# Altium PCB Board_Scale.PcbDoc
Units mm, origin at the board's own origin, x right, y up, seen from the top; angles counter-clockwise.
Board outline 26.42 x 34.42 mm, 2 copper layers (Top Layer, Bottom Layer); 25 components, 23 nets, 116 pads, 34 vias.
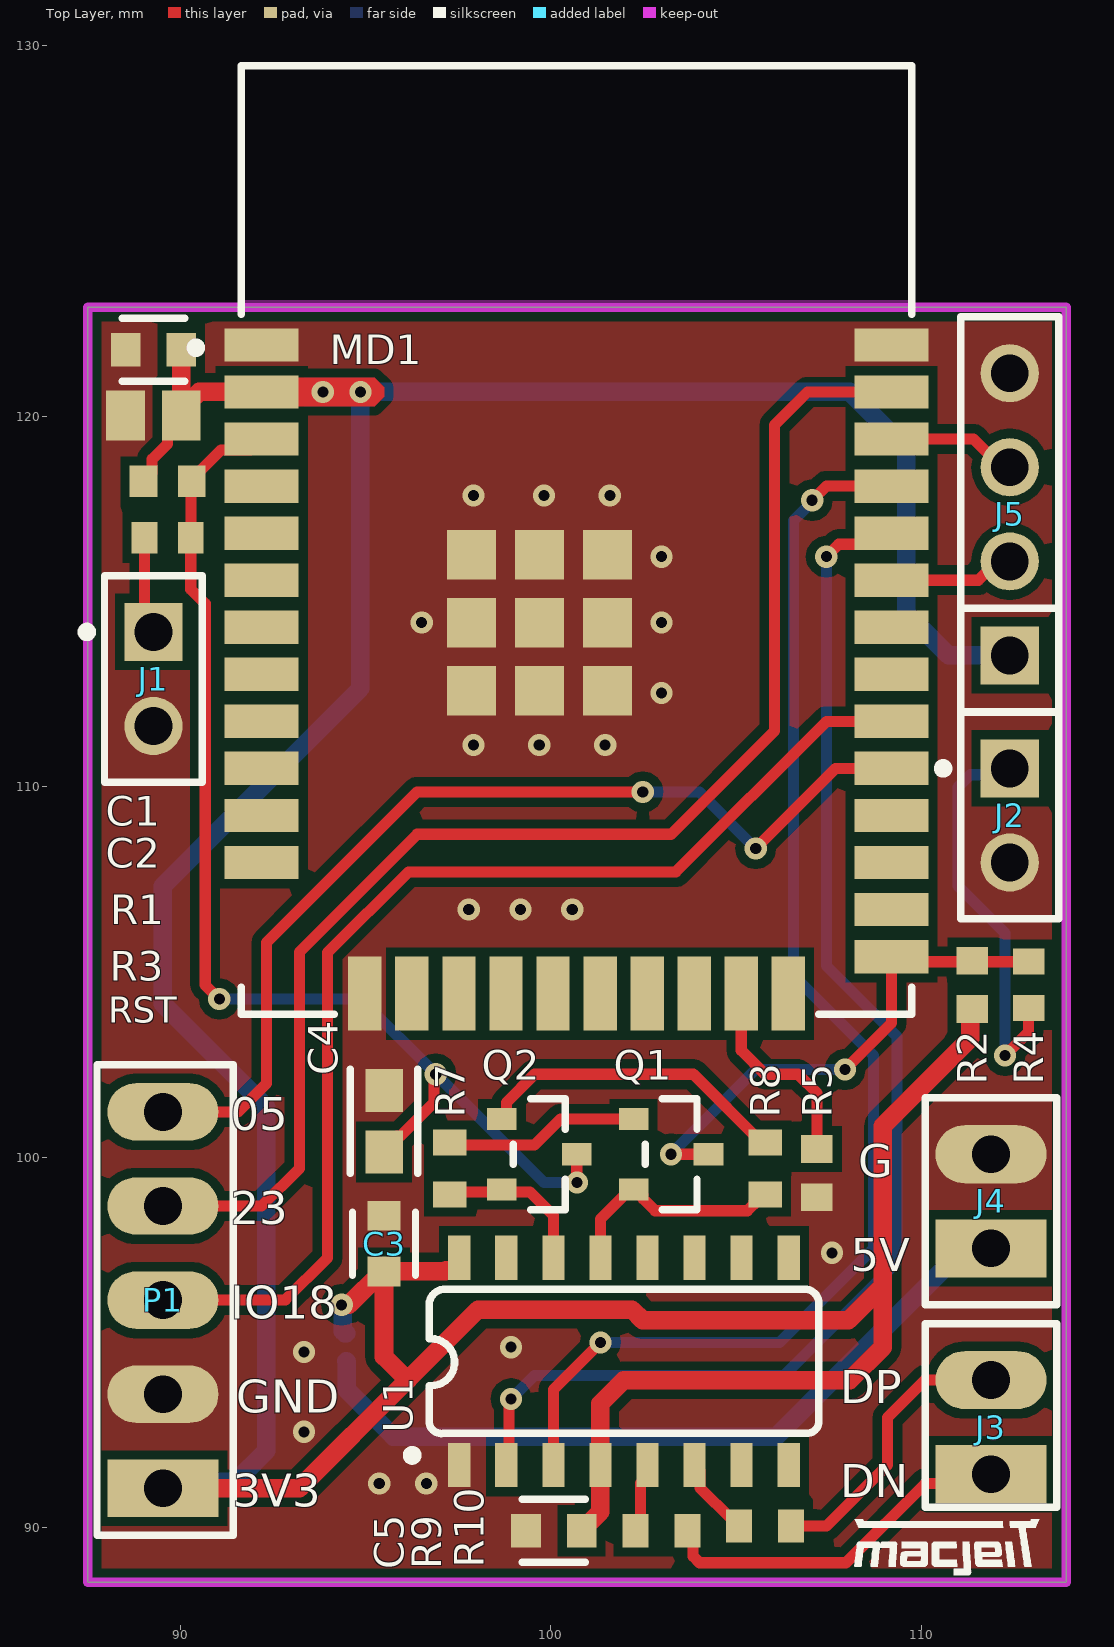
[diagram p0: Top Layer view]
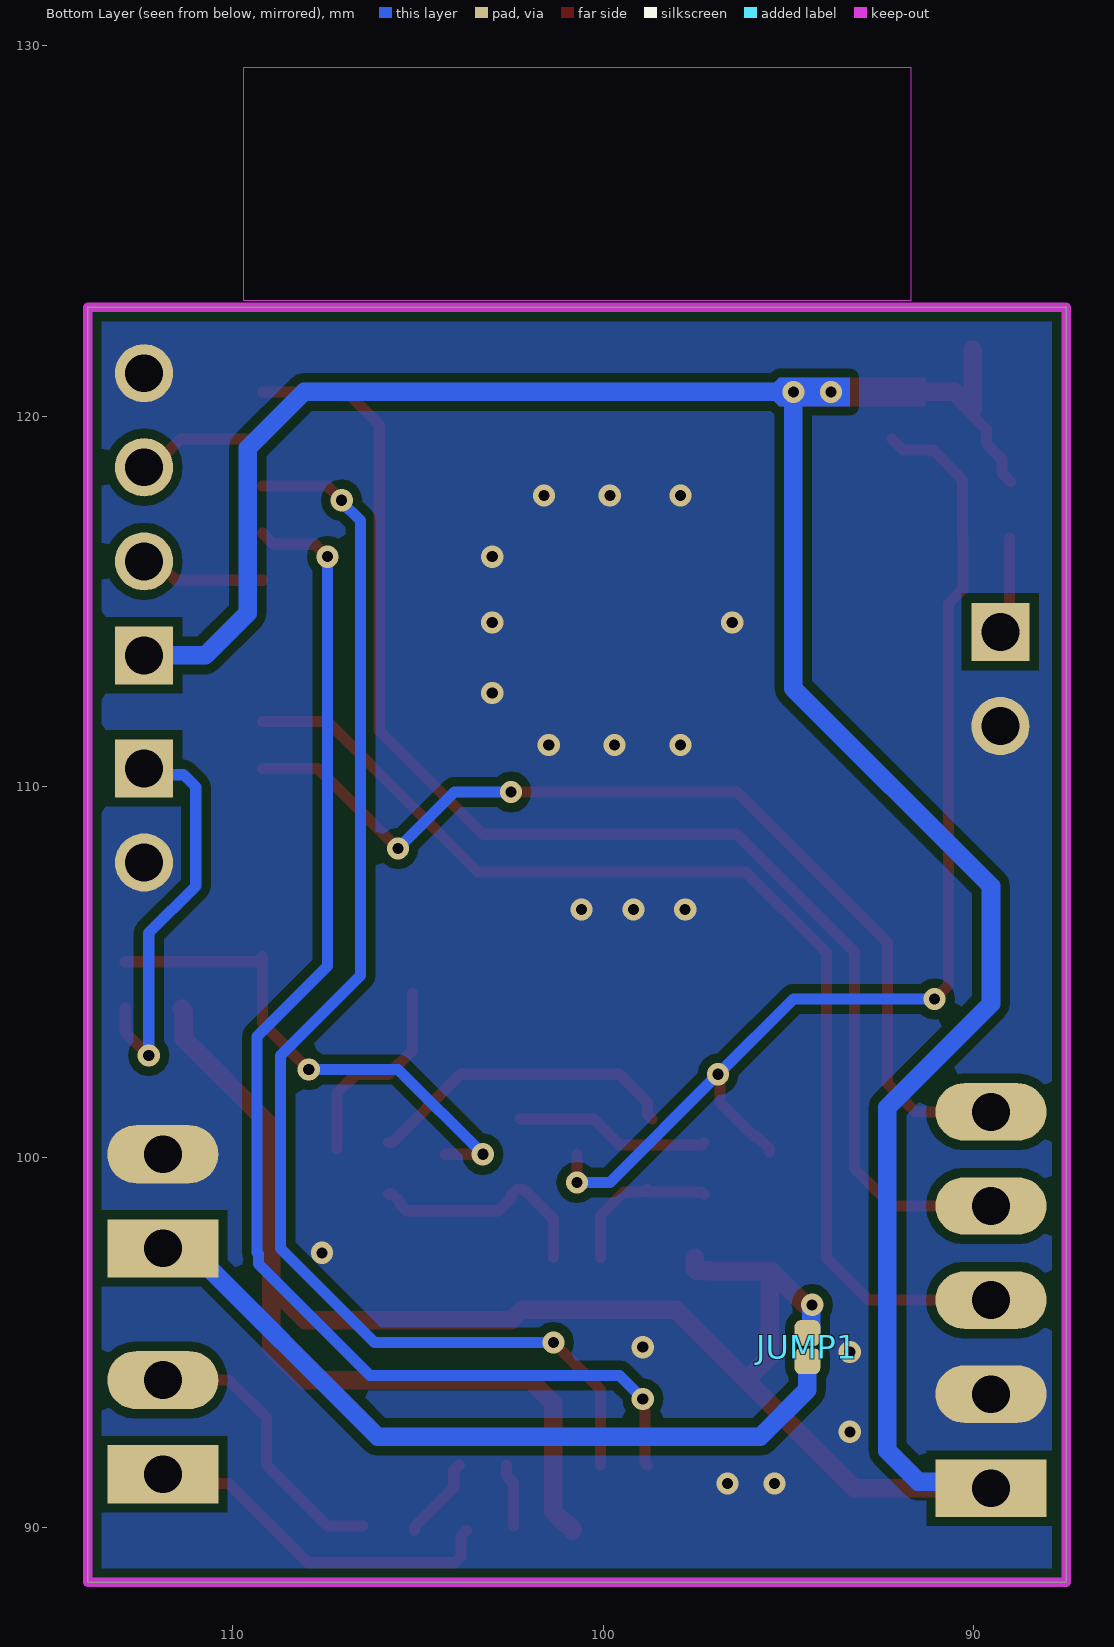
[diagram p1: Bottom Layer view, seen from below]

## Layer stack, top to bottom
Top Solder: solder mask 0.0102, Solder Resist, Dk 3.5
Top Layer: signal copper 0.0356
Dielectric 1: dielectric 0.32, FR-4, Dk 4.8
Bottom Layer: signal copper 0.0356
Bottom Solder: solder mask 0.0102, Solder Resist, Dk 3.5

## Board outline
87.503,88.519 87.503,122.936 113.919,122.936 113.919,88.519

## Design rules (kind name [scope] priority, off if disabled: settings)
Clearance [All] p1: gap=0.254 ignorepadtopadclearanceinfootprint=FALSE
PlaneConnect [All] p1: planeconnectstyle=Direct reliefexpansion=0.508 reliefentries=4 reliefconductorwidth=0.254 reliefairgap=0.254
PolygonConnect [All] p1: connectstyle=Direct reliefconductorwidth=0.254 reliefentries=4 polygonreliefangle="90 Angle" airgapwidth=0.254
RoutingVias [All] p1: holewidth=0.711 width=1.27 viastyle="Through Hole" minholewidth=0.711 minwidth=1.27 maxholewidth=0.711 maxwidth=1.27
SolderMaskExpansion [All] p1: expansion=0.102 istentingtop=FALSE
SupplyNets "Schematic Supply Nets_2" [InNet('VCC')] p1: voltage=0.000
SupplyNets "Schematic Supply Nets_1" [InNet('GND')] p2: voltage=0.000
SupplyNets "Schematic Supply Nets" [InNet('3V3')] p3: voltage=0.000
Width [All] p1: maxlimit=1 minlimit=0.2 preferedwidth=0.3
29 further rules are at their usual default settings.

## Components (designator, comment, footprint, x,y, rotation, side; value= is the part's Value field where it differs from the comment)
C1 "100nF/50V" FP-CC0603-DA-MFG 89.281,121.793 r180 top value="100 nF"
C2 "CL21A226MAQNNNE" CAPC2013X140X45LL15T25 89.281,120.015 r0 top
C3 "100nF/50V" FP-CC0603-DA-MFG 95.504,97.663 r90 top value="100 nF"
C4 "1uF" FP-CL10-IPC_A 95.504,100.965 r90 top
C5 "100nF/50V" FP-CC0603-DA-MFG 100.088,89.916 r180 top value="100 nF"
J1 "M20-9990245" FP-M20-9990245-MFG#1 89.281,112.903 r270 top
J2 "M20-9990245" FP-M20-9990245-MFG#1 112.395,109.22 r270 top
J3 "M20-9990245" FP-M20-9990245-MFG#2 111.887,92.71 r90 top
J4 "M20-9990245" FP-M20-9990245-MFG#2 111.887,98.806 r90 top
J5 "M20-9990445" FP-M20-9990445-MFG 112.395,117.348 r90 top
JUMP1 "JUMPER_2P" JUMPER_2P 94.488,94.869 r0 bottom
MD1 "ESP32-WROOM-32D" FP-ESP32-WROOM-32D-MFG 100.702,116.66 r0 top
P1 "77311-462K05LF" FCI-77311-5_V 89.535,96.139 r90 top
Q1 "SS8050" FP-SS8050-G-MFG 103.251,100.076 r0 top
Q2 "SS8050" FP-SS8050-G-MFG 99.695,100.076 r0 top
R1 "10KR" RESC1609X55X30LL15T15 89.662,118.237 r0 top
R2 "10KR" RESC1609X55X30LL15T15 111.379,104.648 r90 top
R3 "100R" RESC1608X55X30LL15T15 89.662,116.713 r0 top
R4 "100R" RESC1608X55X30LL15T15 112.903,104.648 r90 top
R5 "10KR" RESC1609X55X30LL15T15 107.188,99.568 r270 top
R7 "12KR" RESC1608X55X25NL10T15 97.282,99.695 r90 top
R8 "12KR" RESC1608X55X25NL10T15 105.791,99.695 r90 top
R9 "10R" RESC1608X55X25NL10T15 102.997,89.916 r0 top
R10 "10R" RESC1608X55X25NL10T15 105.791,90.043 r0 top
U1 "CH340C" SO016 101.981,94.488 r0 top

## Footprints (in the part's own frame and the unit in brackets; to place one, negate y for a bottom-side part, rotate by r counter-clockwise, add the part's x,y. Pads: shape width x height; smd on the part's side, far side on the other; paste and mask are expansions set on the pad)
CAPC2013X140X45LL15T25 [mm] "Chip Capacitor, 2-Leads, Body 2.00x1.25mm, IPC High Density"
  rect 1.05x1.35 smd: 1(-0.75,0) 2(0.75,0)
  body extent -1.08,-0.7 1.07,0.7, height 1.4
FCI-77311-5_V [mm] "THD, 5-Leads, Body 12.7x2.4mm, Pitch 2.54mm"
  rect 1.55x3 hole 1.02: 1(-5.08,0)
  oval 1.55x3 hole 1.02: 2(-2.54,0) 3(0,0) 4(2.54,0) 5(5.08,0)
  silkscreen extent -6.35,-1.91 6.35,1.78
FP-CC0603-DA-MFG [mm]
  rect 0.8x0.9 smd paste+0 mask+0: 1(-0.75,0) 2(0.75,0)
  silkscreen extent -0.85,-0.85 0.85,0.85, body extent -1.35,-0.75 1.35,0.75, height 0.25
FP-CL10-IPC_A [mm]
  rect 1.158x1.012 smd paste+0 mask+0: 1(-0.827,0) 2(0.827,0)
  silkscreen extent -1.41,-0.91 1.41,0.91, body extent -1.91,-1.01 1.91,1.01, height 0.25
FP-ESP32-WROOM-32D-MFG [mm]
  rect 2x0.9 smd paste+0 mask+0: 1(-8.5,5.26) 2(-8.5,3.99) 3(-8.5,2.72) 4(-8.5,1.45) 5(-8.5,0.18) 6(-8.5,-1.09) 7(-8.5,-2.36) 8(-8.5,-3.63) 9(-8.5,-4.9) 10(-8.5,-6.17) 11(-8.5,-7.44) 12(-8.5,-8.71) 25(8.5,-11.25) 26(8.5,-9.98) 27(8.5,-8.71) 28(8.5,-7.44) 29(8.5,-6.17) 30(8.5,-4.9) 31(8.5,-3.63) 32(8.5,-2.36) 33(8.5,-1.09) 34(8.5,0.18) 35(8.5,1.45) 36(8.5,2.72) 37(8.5,3.99) 38(8.5,5.26)
  rect 2x0.9 on Top Overlay paste+0 mask+0: 13(-8.5,-9.98) 14(-8.5,-11.25)
  rect 0.9x2 smd paste+0 mask+0: 15(-5.715,-12.25) 16(-4.445,-12.25) 17(-3.175,-12.25) 18(-1.905,-12.25) 19(-0.635,-12.25) 20(0.635,-12.25) 21(1.905,-12.25) 22(3.175,-12.25) 23(4.445,-12.25) 24(5.715,-12.25)
  rect 1.33x1.33 smd paste+0 mask+0: 39(-2.835,-4.075) 39(-2.835,-2.24) 39(-2.835,-0.405) 39(-1,-4.075) 39(-1,-2.24) 39(-1,-0.405) 39(0.835,-4.075) 39(0.835,-2.24) 39(0.835,-0.405)
  Keep-Out Layer region: -9,6.45 9,6.45 9,12.75 -9,12.75
  Keep-Out Layer region: -9,6.45 9,6.45 9,12.75 -9,12.75
  silkscreen extent -10.4,-12.8 9.05,12.8, body extent -9.6,-13.35 9.6,12.9, height 0.25
FP-M20-9990245-MFG#1 [mm]
  rect 1.57x1.57 hole 1.02 paste-2539.97 mask+0: 1(-1.27,0)
  round 1.57 hole 1.02 paste-2539.97 mask+0: 2(1.27,0)
  silkscreen extent -2.79,-1.92 2.79,1.32
FP-M20-9990245-MFG#2 [mm]
  rect 1.57x3 hole 1.02 paste-2539.97 mask+0: 1(-1.27,0)
  oval 1.57x3 hole 1.02 paste-2539.97 mask+0: 2(1.27,0)
  silkscreen extent -2.16,-1.78 2.79,1.78
FP-M20-9990445-MFG [mm]
  rect 1.57x1.57 hole 1.02 paste-2539.97 mask+0: 1(-3.81,0)
  round 1.57 hole 1.02 paste-2539.97 mask+0: 2(-1.27,0) 3(1.27,0) 4(3.81,0)
  silkscreen extent -5.33,-1.32 5.33,1.32
FP-SS8050-G-MFG [mm]
  rect 0.8x0.6 smd paste+0 mask+0: 1(-1.01,0.95) 2(-1.01,-0.95) 3(1.01,0)
  silkscreen extent -0.7,-1.5 0.7,1.5, body extent -1.51,-1.6 1.51,1.6, height 0.25
JUMPER_2P [mm]
  rrect50% 0.7x0.7 smd paste-2539.97: 1(0,0.381) 2(0,-0.381)
RESC1608X55X25NL10T15 [mm] "Chip Resistor, 2-Leads, Body 1.70x0.90mm, IPC Medium Density"
  rect 0.7x0.9 smd: 1(-0.7,0) 2(0.7,0)
  body extent -0.85,-0.45 0.85,0.45, height 0.55
RESC1608X55X30LL15T15 [mm] "Chip Resistor, 2-Leads, Body 1.60x0.80mm, IPC High Density"
  rect 0.7x0.85 smd: 1(-0.625,0) 2(0.625,0)
  body extent -0.87,-0.48 0.87,0.48, height 0.55
RESC1609X55X30LL15T15 [mm] "Chip Resistor, 2-Leads, Body 1.75x0.95mm, IPC High Density"
  rect 0.75x0.85 smd: 1(-0.65,0) 2(0.65,0)
  body extent -0.87,-0.48 0.87,0.48, height 0.55
SO016 [mm]
  rect 0.6x1.2 smd: 1(-4.445,-2.8) 2(-3.175,-2.8) 3(-1.905,-2.8) 4(-0.635,-2.8) 5(0.635,-2.8) 6(1.905,-2.8) 7(3.175,-2.8) 8(4.445,-2.8) 9(4.445,2.8) 10(3.175,2.8) 11(1.905,2.8) 12(0.635,2.8) 13(-0.635,2.8) 14(-1.905,2.8) 15(-3.175,2.8) 16(-4.445,2.8)
  silkscreen extent -5.84,-2.67 5.26,1.95, body extent -5,-2.87 5,3.13, height 1.8

## Part data
C1 C3 C5: library part CMP-2100-03601-2, "CAP CER 0.1UF 50V X7R 0603", Capacitance="100 nF", LCSC=C14663, Manufacturer=YAGEO, Manufacturer Part Number=CC0603KRX7R9BB104, Package=CC0603-DA, Temperature="-55°C to +125°C", Temperature Characteristic=X7R, Temperature Coefficient=15%, Temperature Range High=+125°C, Temperature Range Low=-55°C, Tolerance=0.1, Voltage="50 V", Automotive=No, Category=Cap, ComponentLink2Description=Datasheet, ComponentLink2URL=http://www.yageo.com/documents/recent/UPY-GPHC_X7R_6.3V-to-50V_18.pdf, Device Class L1="Passive Components", Device Class L2=Capacitors, Device Class L3="Ceramic Capacitors", Digikey Description="CAP CER 0.1UF 50V X7R 0603", Footprint Url=http://www.yageo.com/exep/pages/download/literatures/UPY-C_GEN_24.pdf, Height=0.9mm, Lead Free=Yes, Material=Ceramic, Mouser Description="Multilayer Ceramic Capacitor, CC Series, 0.1 - F, - 10%, X7R, 50 V, 0603 [1608 Metric]", Octopart=https://octopart.com/cc0603krx7r9bb104-yageo-42244635, RoHS=TRUE, Voltage Rating="50 V"
C2: library part CMP-2000-06104-1, "Multi-layer Ceramic Capacitor, 22 uF, -55 to 85 degC, 2-Pin SMD (0805), RoHS, Tape and Reel", Capacitance=22µF, LCSC=C45783, Manufacturer="Samsung Electro-Mechanics", Operating Temperature=-55°C~85°C, Package / Case=0805(2012Metric), Package Description="2-Pin Surface Mount Device, Body 2.0 x 1.25 mm", Package Reference=0805, Ratings=-, Standard Package=2,000, Temperature Coefficient=X5R, Tolerance=±20%, Voltage - Rated=25V, Applications=GeneralPurpose, Category=Capacitors, Datasheet URL=http://datasheet.octopart.com/CL21A226MAQNNNE-Samsung-datasheet-48647558.pdf, Datasheet Version=07/2015, Family=CeramicCapacitors, Featured Product=Multi-LayerCeramicCapacitors, Features=-, Height - Seated (Max)=-, Lead Spacing=-, Lead Style=-, Manufacturer URL=http://www.samsungsem.com/global/index.jsp, Mounting Technology=SurfaceMount, Mounting Type=SurfaceMount,MLCC, Online Catalog=CLSeries,HighCapacitance, Other Names=1276-2908-2, Packaging=Tape&Reel(TR), Product Training Modules=HighCapMLCCFamily, RoHS Information=MLCCRoHS2Compliance, Series=CL, Size / Dimension="0.079\"Lx0.049\"W(2.00mmx1.25mm)", Thickness (Max)="0.055\"(1.40mm)"
C4: library part CMP-13271-001457-1, "Cap Ceramic 1uF 16V X5R ±10% Pad SMD 0603 +85°C T/R", Case Code (Imperial)=0603, Case Code (Metric)=1608, Dielectric=X5R, LCSC=C1592, Max Operating Temperature=85°C, Min Operating Temperature=-55°C, Package Quantity=1, Tolerance=10%, Voltage=16V, Capacitance=1uF, Case/Package=0603, Contact Plating=Tin, Depth=0.8mm, Height=0.8mm, Lead Free="Lead Free", Length=1.6mm, Material=Ceramic, Mount="Surface Mount", Packaging="Tape and Reel", Radiation Hardening=No, Thickness=0.035inch, Voltage Rating=16V, Voltage Rating (DC)=16V, Width=0.031inch
J1 J2 J3 J4: library part CMP-15831-000105-1, "CONN HEADER VERT 2POS 2.54MM", Case/Package=SIL, Color=Black, Contact Resistance=25mR, Current=3A, Flammability Rating="UL94 V-0", Insulation Resistance=10GR, Max Operating Temperature=105°C, Min Operating Temperature=-40°C, Package Quantity=1000, Voltage=50V, Voltage Rating (AC)=750V, Connector Type="Male Pin", Contact Finish - Mating=GOLD, Contact Material=Brass, Contact Mating Length=0.24inch, Contact Plating=Gold, Contact Shape=Square, Contact Type="Male Pin", Current Rating=3A, Depth=2.54mm, Fastening Type=Pull, Gender=Male, Height=0.12inch, Housing Color=Black, Housing Material=Nylon, Insulation Color=Black, Insulation Material=Nylon, Lead Pitch=2.54mm, Length=5.08mm, Mated Stacking Heights=16.54mm, Mating Cycles=300, Max Current Rating=3A, Mount="Through Hole", Number Of Contacts=2, Number of Poles=2, Number of Positions=2, Number Of Rows=1, Orientation=Straight, Packaging=Bulk, Pitch=2.54mm, Radiation Hardening=No, Reach SVHC Compliant=Yes, Series=M20, Termination=Solder, Weight=0.25lb, Width=0.25inch, Working Voltage=750V
J5: library part CMP-00671-05399696-1, "M20-9990445 Conn Unshrouded Header HDR 4 POS 2.54mm Solder ST Thru-Hole Bulk/Loose", Case/Package=SIL, Color=Black, Contact Resistance=25mΩ, Current Rating=3A, Insulation Resistance=10GΩ, Max Operating Temperature=105°C, Min Operating Temperature=-40°C, Voltage Rating (AC)=750V, Connector Type="Male Pin", Contact Material="Brass, Bronze, Gold, Nickel", Contact Mating Length=6.096mm, Contact Plating=Gold, Depth=2.54mm, Gender=Male, Height=2.54mm, Housing Color=Black, Housing Material=Nylon, Lead Pitch=2.54mm, Length=10.16mm, Max Current Rating=3A, Mount="Through Hole", NexarPartId=5399696, Number Of Contacts=4, Number of Pins=4, Number of Positions=4, Number Of Rows=1, Orientation=Straight, Pitch=2.54mm, Radiation Hardening=No, REACH SVHC="No SVHC", RoHS=Compliant, Termination=Solder, Voltage Rating (DC)=750V, Weight=45.359237g, Width=12.7mm
MD1: library part CMP-194065-000003-1, "WIFI MODULE 32MBITS SPI FLASH", LCSC=C473012, Manufacturer="Espressif Systems", Max Frequency=2484MHz, Max Supply Voltage=3.6V, Min Supply Voltage=3V, Nominal Supply Current=500mA, Temperature="-40°C to +85°C", Temperature Range High=+85°C, Temperature Range Low=-40°C, Automotive=No, Bandwidth=72MHz, Category=UNK, ComponentLink2Description=Datasheet, ComponentLink2URL=https://www.espressif.com/sites/default/files/documentation/esp32-wroom-32d_esp32-wroom-32u_datasheet_en.pdf, Data Rate=150Mbits/s, Device Class L1="Integrated Circuits (ICs)", Device Class L2="RF Semiconductors and Devices", Device Class L3=Transceivers, Digikey Description="WIFI MODULE 32MBITS SPI FLASH", Height=3.2mm, Interface=I2C,SPI,UART,Ethernet,I2S,Other, Lead Free=Yes, Manufacturer Part Number=ESP32-WROOM-32D, Mouser Description="Wi-Fi/BT BLE Module ESP32-D0WD, SPI Flash, UART, P", Number Of Adc Channels=16, Number Of Gpio=32, Octopart=https://octopart.com/esp32-wroom-32d-espressif+systems-91040050, Package=ESP32-WROOM-32D, RoHS=TRUE, Sensitivity=-98dBm
P1: library part CMP-1698-00006-1, "Male Header, Pitch 2.54 mm, 1 x 5 Position, Height 16.24 mm, Tail Length 3.05 mm,  / -65 to 125 degC, RoHS, Tape and Reel", Current Rating="1 A", Max Operating Temperature=85degC, Min Operating Temperature=-25degC, Package Quantity=500, ComponentLink1Description="Manufacturer URL", ComponentLink1URL=http://portal.fciconnect.com/, ComponentLink2Description=Datasheet, ComponentLink2URL=http://portal.fciconnect.com/Comergent//fci/drawing/77311.pdf, Contact Material=Brass, DatasheetVersion="Rev. CK, 07/2016", Gender=Female, PackageDescription="Male Header, Pitch 2.54 mm, 1 x 5 Position, Height 16.24 mm, Tail Length 3.05 mm", PackageReference=77311-5, Packaging="Tape and Reel", RoHSCompliant=True, Shielding=Shielded
Q1 Q2: library part CMP-20235-000001-1, "NPN TRANSISTOR 1.5A 40V SOT-23 R", Case/Package=TO-236-3, Collector Emitter Breakdown Voltage=25V, Collector Emitter Voltage (VCEO)=400mV, LCSC=C181160, Max Collector Current=1.5A, Max Power Dissipation=300mW, Transition Frequency=100MHz, Max Breakdown Voltage=25V, Mount="Surface Mount", Packaging="Tape and Reel", RoHS Compliant=Yes
R1 R2 R5: library part CMP-1012-00623-3, "Chip Resistor, 10 KOhm, +/- 1%, 0.1 W, -55 to 155 degC, 0603 (1608 Metric), RoHS, Tape and Reel", Case Code (Imperial)=0603, Case Code (Metric)=1608, LCSC=C25804, Manufacturer=Panasonic, Max Operating Temperature=155degC, Max Power Dissipation=100mW, Min Operating Temperature=-55degC, Package Description="2-Pin Surface Mount Device, Body 1.6 x 0.85 mm", Package Quantity=1, Package Reference=603, Resistance=10KOhm, Temperature Coefficient=100ppm\/degreesC, Tolerance=1%, Voltage Rating=75V, Case\/Package=0603, Composition=ThickFilm, Contact Plating=Tin, Datasheet URL=https://industrial.panasonic.com/cdbs/www-data/pdf/RDA0000/AOA0000C304.pdf, Datasheet Version=02/2017, Depth=0.8mm, Height=0.45mm, Lead Free=LeadFree, Length=1.6mm, Manufacturer URL=http://www.panasonic.com/, Military Standard=Not, Mount=SurfaceMount, Mounting Technology=SurfaceMount, Number of Pins=2, Number of Terminations=2, Packaging=TapeandReel, Power Rating=100mW, Radiation Hardening=No, REACH SVHC=NoSVHC, RoHSCompliant=true, Termination=SMD/SMT, Voltage Rating (DC)=75V, Width=0.031inch
R3 R4: library part CMP-2000-00179-1, LCSC=C22775, Manufacturer=Panasonic, Part Number=ERJ-3EKF1000V
R7 R8: library part CMP-1659-00047-2, "Chip Resistor, 12 KOhm, +/- 1%, 100 mW, -55 to 155 degC, 0603 (1608 Metric), RoHS, Tape and Reel", Case Code (Imperial)=0603, Case Code (Metric)=1608, LCSC=C22790, Max Operating Temperature="155 degC", Min Operating Temperature="-55 degC", Package Quantity=5000, Power Rating="100 mW", Resistance="12 kohm", Tolerance=1%, Voltage Rating="50 V", Case\Package=0603, ComponentLink1Description="Manufacturer URL", ComponentLink1URL=http://www.yageo.com/, ComponentLink2Description=Datasheet, ComponentLink2URL=http://www.yageo.com/documents/recent/PYu-RC_Group_51_RoHS_L_04.pdf, DatasheetVersion="Rev. 4, 02/2016", Height="0.45 mm", Length="1.6 mm", Mount="Surface Mount", PackageDescription="2-Pin Surface Mount Device, Body 1.6 x 0.8 mm", PackageReference=0603, Packaging="Tape and Reel", Pins=2, REACH SVHC="No SVHC", RoHSCompliant=true, Voltage Rating (DC)="50 V", Width="0.8 mm"
R9 R10: library part CMP-1659-00008-4, "Chip Resistor, 10 Ohm, +/- 1%, 0.1 W, -55 to 155 degC, 0603 (1608 Metric), RoHS, Tape and Reel", LCSC=C22859, Manufacturer=Yageo, Max Operating Temperature="155 degC", Min Operating Temperature="-55 degC", Package Quantity=200, Voltage Rating="50 V", ComponentLink1Description="Manufacturer URL", ComponentLink1URL=http://www.yageo.com/, ComponentLink2Description=Datasheet, ComponentLink2URL=http://www.yageo.com/documents/recent/PYu-RC_Group_51_RoHS_L_04.pdf, ComponentLink3Description="Package Specification", ComponentLink3URL=http://www.farnell.com/datasheets/443971.pdf, DatasheetVersion="Rev. 4, 02/2016", Height="0.45 mm", Length="1.6 mm", Mount="Surface Mount", Mounting Technology="Surface Mount", PackageDescription="2-Pin Surface Mount Device, Body 1.6 x 0.8 mm", PackageReference=0603, Packaging="Tape and Reel", Pins=2, REACH SVHC="No SVHC", RoHSCompliant=true
U1: "Replacement for Brother P-Touch", LCSC=C7464026, Package=None, Check_prices=https://www.snapeda.com/parts/CH340C/Olimex/view-part/?ref=eda, MF=Olimex, MP=CH340C, SnapEDA_Link=https://www.snapeda.com/parts/CH340C/Olimex/view-part/?ref=snap

## Via types
v1: diameter 0.6, hole 0.3, Top Layer to Bottom Layer, tented both sides, 34 vias

## Nets (pads, with @x,y where several pads share a name; then routed paths per layer and width w, separated by ;. In a path a pad name is that pad's centre, name@x,y a point inside that pad or via, vN(x,y) a via of type N, cw(c..) or ccw(c..) an arc to the next point about the centre after c; other vN are vias at no path point)
3V3: C1.1 C2.2 C3.1 C5.1 J5.1 JUMP1.2 MD1.2 P1.1 R1.1 R2.1 U1.4 U1.16 | length 116.3
  Top Layer w0.3: R1.1 89.237,118.462 89.237,118.834 89.656,119.253 89.656,119.64 C2.2
  Top Layer w0.5: P1.1 93.218,91.059 96.139,93.98 ; C1.1 90.031,120.165 90.516,120.65 MD1.2 ; v1(94.361,96.012) 94.553,96.012 95.454,96.913 C3.1 ; U1.16 97.536,96.988 97.486,96.938 97.186,96.938 97.161,96.913 C3.1 ; C5.1 100.838,89.966 100.988,90.116 101.038,90.116 101.346,90.424 U1.4 101.346,93.345 101.981,93.98 108.077,93.98 108.966,94.869 108.966,96.52 ; R2.1 111.322,103.941 111.322,103.194 108.966,100.838 108.966,96.52 ; C3.1 95.504,94.615 96.139,93.98 ; 96.139,93.98 98.044,95.885 102.196,95.885 102.489,95.592 108.038,95.592 108.966,96.52
  Bottom Layer w0.5: P1.1 89.714,91.238 91.492,91.238 92.329,92.075 92.329,101.346 89.535,104.14 89.535,107.315 94.869,112.649 v1(94.869,120.65) 108.077,120.65 109.601,119.126 109.601,114.681 110.744,113.538 J5.1 ; v1(94.361,96.012) 94.361,95.985 94.388,95.958 94.388,95.3 94.438,95.25 JUMP1.2
  other v1: 93.853,120.65
DP_N: J3.2 R10.2 | length 7.8
  Top Layer w0.3: R10.2 107.442,90.043 109.093,91.694 109.093,92.964 110.109,93.98 J3.2
DP_P: J3.1 R9.2 | length 9.9
  Top Layer w0.3: R9.2 103.843,89.77 103.843,89.226 104.019,89.05 107.973,89.05 110.113,91.19 111.637,91.19 J3.1
DPP_N: R10.1 U1.6 | length 2.3
  Top Layer w0.3: U1.6 104.036,91.538 104.036,91.071 104.891,90.216 105.091,90.016 R10.1@105.091,89.916
DPP_P: R9.1 U1.5 | length 1.7
  Top Layer w0.3: R9.1@102.424,90.043 102.424,91.196 102.616,91.388 U1.5
DTR: Q1.2 R8.1 U1.13 | length 6.3
  Top Layer w0.3: U1.13 101.346,98.331 102.141,99.126 102.341,99.126 102.491,98.976 102.491,98.876 102.815,98.552 105.315,98.552 105.491,98.728 105.491,98.795 105.691,98.995 R8.1
EN: C4.1 MD1.3 Q2.3 R1.2 R3.2 | length 31.9
  Top Layer w0.3: v1(91.059,104.267) 90.678,104.648 90.678,114.935 90.287,115.326 R3.2 90.299,116.725 90.299,118.275 91.105,119.08 91.902,119.08 MD1.3 ; C4.1@95.52,100.138 95.52,100.227 95.86,100.567 95.949,100.567 96.853,101.472 96.853,102.187 v1(96.901,102.235) ; Q2.3 100.705,99.32 v1(100.711,99.314)
  Bottom Layer w0.3: v1(91.059,104.267) 94.869,104.267 v1(96.901,102.235) 99.822,99.314 v1(100.711,99.314)
GND: C1.2 C2.1 C3.2 C4.2 C5.2 J1.2 J2.2 J4.2 J5.4 MD1.1 MD1.15 MD1.38 MD1.39 P1.2 R5.2 U1.1
  other v1: 95.377,91.186 96.647,91.186 93.345,92.583 93.345,94.742 98.933,94.869 107.595,97.414 97.79,106.68 99.187,106.68 100.584,106.68 97.917,111.125 99.695,111.125 101.473,111.125 102.997,112.522 96.52,114.427 102.997,114.427 102.997,116.205 97.917,117.856 99.822,117.856 101.6,117.856
IO0: MD1.25 Q1.3 R2.2 R4.2 | length 14
  Top Layer w0.3: v1(103.251,100.076) Q1.3 ; v1(107.95,102.362) 109.202,103.614 MD1.25 109.339,105.273 R4.2
  Bottom Layer w0.3: v1(103.251,100.076) 105.537,102.362 v1(107.95,102.362)
IO5: MD1.29 P1.5 | length 27
  Top Layer w0.3: P1.5 91.567,101.219 92.329,101.981 92.329,105.791 96.393,109.855 v1(102.489,109.855) ; v1(105.537,108.331) 107.696,110.49 MD1.29
  Bottom Layer w0.3: v1(102.489,109.855) 104.013,109.855 v1(105.537,108.331)
IO18: MD1.30 P1.3 | length 31
  Top Layer w0.3: P1.3 92.837,96.139 93.98,97.282 93.98,105.516 96.16,107.696 103.378,107.696 107.442,111.76 MD1.30
IO21: J5.2 MD1.33 | length 3.4
  Top Layer w0.3: MD1.33 111.543,115.57 112.051,116.078 J5.2
IO22: J5.3 MD1.36 | length 3.5
  Top Layer w0.3: MD1.36 111.41,119.38 112.172,118.618 J5.3
IO23: MD1.37 P1.4 | length 37
  Top Layer w0.3: P1.4 92.202,98.679 93.218,99.695 93.218,105.537 96.393,108.712 103.251,108.712 106.045,111.506 106.045,119.761 106.934,120.65 MD1.37
NetJ1_1: J1.1 R3.1 | length 2.6
  Top Layer w0.3: R3.1 89.037,114.417 J1.1
NetJ2_1: J2.1 R4.1 | length 10.9
  Top Layer w0.3: v1(112.268,102.743) 112.903,103.378 R4.1
  Bottom Layer w0.3: v1(112.268,102.743) 112.268,106.045 110.998,107.315 110.998,109.982 111.336,110.32 112.225,110.32 J2.1
NetMD1_23: MD1.23 R5.1 | length 5.6
  Top Layer w0.3: MD1.23 105.147,102.879 105.791,102.235 106.68,102.235 107.188,101.727 R5.1
NetQ1_1: Q1.1 R7.2 | length 5.3
  Top Layer w0.3: R7.2 97.355,100.322 99.56,100.322 100.264,101.026 Q1.1
NetQ2_1: Q2.1 R8.2 | length 8.6
  Top Layer w0.3: Q2.1 98.806,101.147 98.806,101.473 99.568,102.235 103.851,102.235 105.691,100.395 R8.2
RTS: Q2.2 R7.1 U1.14 | length 4.3
  Top Layer w0.3: R7.1 97.348,99.061 98.747,99.061 98.812,99.126 98.878,99.06 99.441,99.06 100.076,98.425 U1.14
U0R: MD1.34 U1.2 | length 35.6
  Top Layer w0.3: U1.2 98.876,91.758 98.876,93.415 v1(98.933,93.472) ; v1(107.442,116.205) 107.777,116.54 108.902,116.54 MD1.34
  Bottom Layer w0.3: v1(98.933,93.472) 99.568,94.107 106.299,94.107 109.301,97.109 109.301,97.384 109.347,97.43 109.347,103.251 107.442,105.156 v1(107.442,116.205)
U0T: MD1.35 U1.3 | length 35.8
  Top Layer w0.3: U1.3 100.076,93.726 v1(101.346,94.996) ; v1(107.061,117.729) 107.442,118.11 MD1.35
  Bottom Layer w0.3: v1(101.346,94.996) 106.172,94.996 108.712,97.536 108.712,102.743 106.553,104.902 106.553,117.176 107.061,117.684 v1(107.061,117.729)
VCC: J4.1 JUMP1.1 | length 20.8
  Bottom Layer w0.5: JUMP1.1 94.498,94.478 94.498,93.716 95.758,92.456 106.092,92.456 111.172,97.536 J4.1
pads on no net: MD1.4 MD1.5 MD1.6 MD1.7 MD1.8 MD1.9 MD1.10 MD1.11 MD1.12 MD1.13 MD1.14 MD1.16 MD1.17 MD1.18 MD1.19 MD1.20 MD1.21 MD1.22 MD1.24 MD1.26 MD1.27 MD1.28 MD1.31 MD1.32 U1.7 U1.8 U1.9 U1.10 U1.11 U1.12 U1.15

## Polygon pours and split planes (outlines as drawn)
GND on Top Layer "GND_L01_P000" (solid, pour order 0): 87.503,88.519 87.503,122.936 113.919,122.936 113.919,88.519
GND on Bottom Layer "GND_L02_P001" (solid, pour order 1): 87.503,88.519 87.503,122.936 113.919,122.936 113.919,88.519

## Keep-outs
Keep-Out Layer:
  the board outline again, w0.254

## Other copper
Top Layer:
  region net 3V3: 91.313,121.031 95.25,121.031 95.504,120.777 95.504,120.523 95.25,120.269 91.313,120.269
Bottom Layer:
  region net 3V3: 93.345,121.031 95.25,121.031 95.504,120.777 95.504,120.523 95.25,120.269 93.345,120.269

## Silkscreen, mask and mechanical layers (free items; w line width, h text height)
Top Overlay:
  drawing of 8 lines, arcs and shapes, not listed
  text "RST" at 88.058,103.392 h1.2
  text "05" at 91.365,100.425 h1.52
  text "G" at 108.299,99.155 h1.52
  text "23" at 91.365,97.885 h1.52
  text "5V" at 108.104,96.615 h1.52
  text "IO18" at 91.366,95.345 h1.52
  text "DP" at 107.823,93.059 h1.52
  text "GND" at 91.517,92.805 h1.52
  text "DN" at 107.823,90.519 h1.52
  text "3V3" at 91.425,90.265 h1.52